# Altium PCB connecters.PcbDoc
Units mm, origin at the board's own origin, x right, y up, seen from the top; angles counter-clockwise.
Board outline 50 x 25 mm, 2 copper layers (Top Layer, Bottom Layer); 11 components, 9 nets, 37 pads, 25 vias.
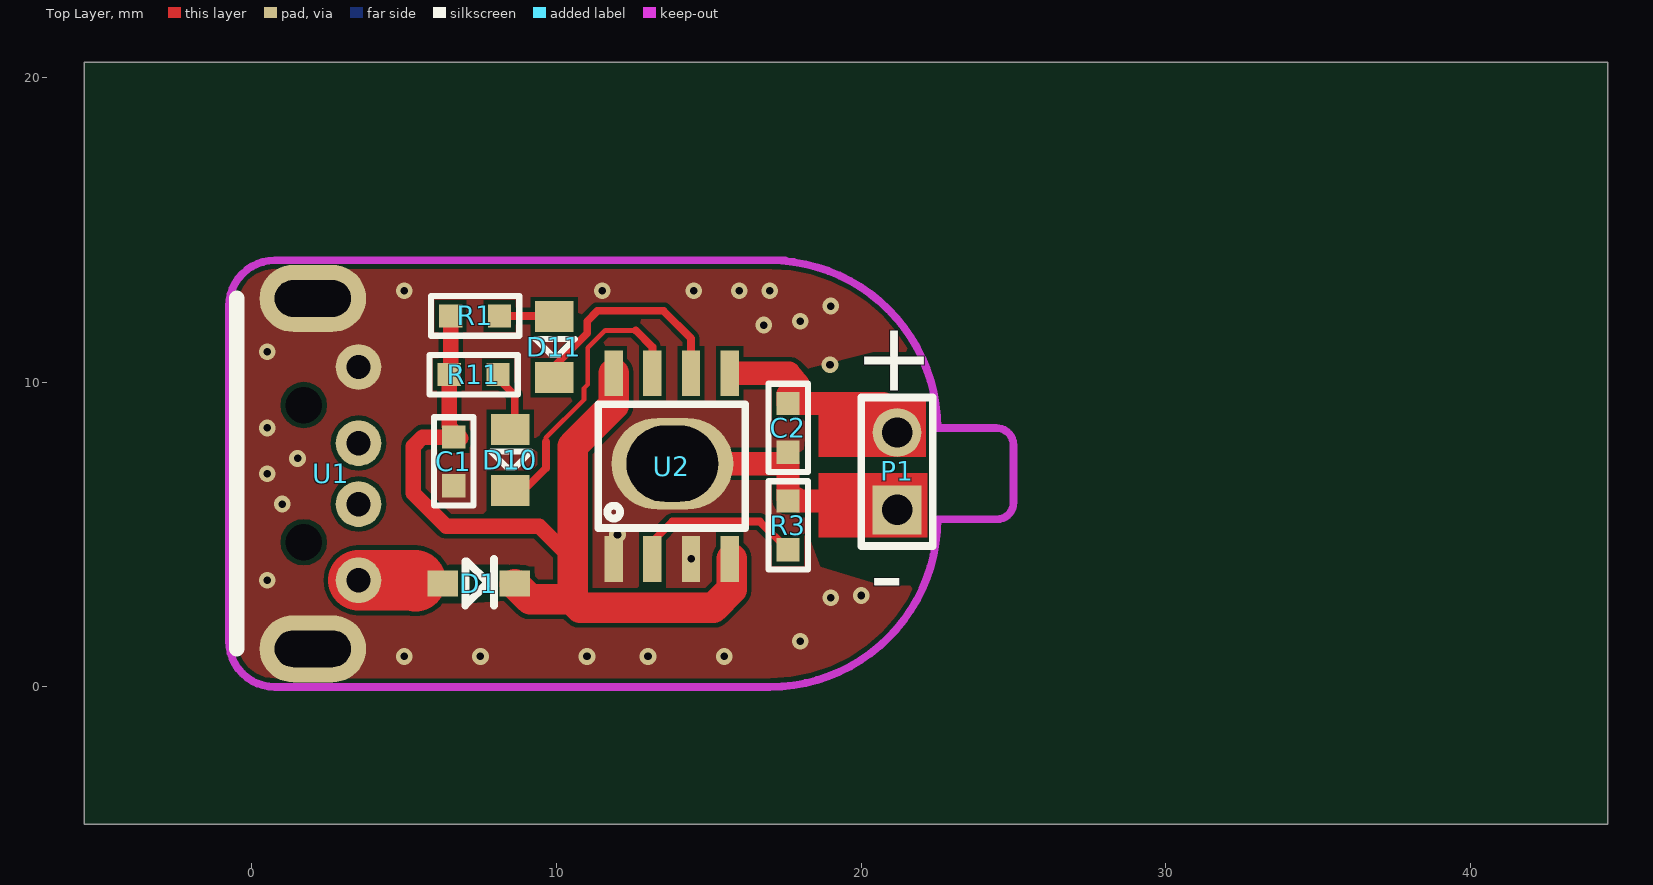
[diagram p0: Top Layer view]
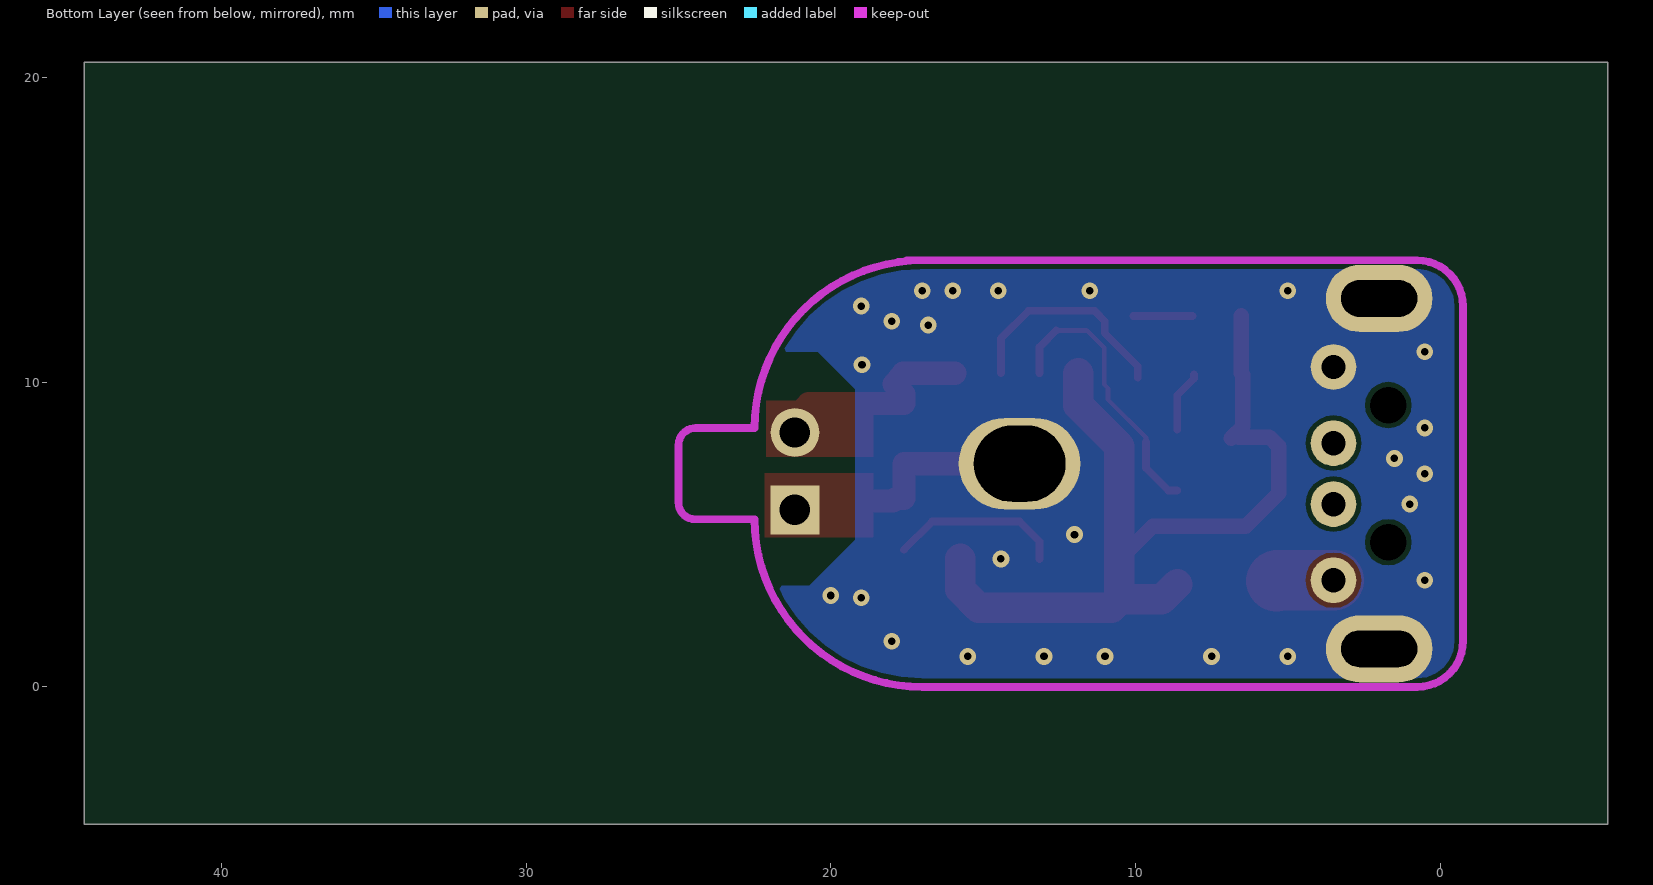
[diagram p1: Bottom Layer view, seen from below]

## Layer stack, top to bottom
Top Layer: signal copper 0.0356
Dielectric: dielectric 0.32, FR-4, Dk 4.8
Bottom Layer: signal copper 0.0356

## Board outline
-5.5,20.5 -5.5,-4.5 44.5,-4.5 44.5,20.5

## Design rules (kind name [scope] priority, off if disabled: settings)
Clearance [All] p1: gap=0.152
ComponentClearance [All] p1 off: gap=0.254 collisioncheckmode=3 verticalgap=0.254 showdistances=FALSE
Height [All] p1 off: minheight=0 maxheight=25.4 prefheight=12.7
HoleToHoleClearance [All] p1 off: gap=0.254 allowstackedmicrovias=TRUE
MinimumSolderMaskSliver [All] p1 off: minsoldermaskwidth=0.254
PlaneConnect [All] p1: planeconnectstyle=Direct reliefexpansion=0.508 reliefentries=4 reliefconductorwidth=0.254 reliefairgap=0.254
PolygonConnect [All] p1: connectstyle=Direct reliefconductorwidth=0.254 reliefentries=4 polygonreliefangle="90 Angle" airgapwidth=0.254
RoutingVias [All] p1: holewidth=0.25 width=0.55 viastyle="Through Hole" minholewidth=0.25 minwidth=0.55 maxholewidth=3 maxwidth=30
SilkToSilkClearance [All] p1 off: silktosilkclearance=0.254
SilkToSolderMaskClearance [IsPad] p1 off: minsilkscreentomaskgap=0.254 clearancetoexposedcopper=TRUE
SolderMaskExpansion [All] p1: expansion=0.102
Width [All] p1: maxlimit=25.4 minlimit=0.152 preferedwidth=0.152 minimp=50.000000 maximp=50.000000 favimp=50.000000
21 further rules are at their usual default settings.

## Components (designator, comment, footprint, x,y, rotation, side; value= is the part's Value field where it differs from the comment)
C1 "C10uF" 0603C 6.625,8.2 r270 top
C2 "C10uF" 0603C 17.6,9.3 r270 top
D1 "1N5819WS" LC-SOD-323F 7.45,3.4 r180 top
D10 "LED-B" LED 8.475,8.45 r270 top
D11 "LED-R" LED 9.925,12.15 r270 top
P1 "Head2" HEAD2 21.175,8.35 r180 top
R1 "R2K" 0603R 8.125,12.175 r180 top
R3 "1K" 0603R 17.6,6.1 r270 top
R11 "R2K" 0603R 8.075,10.25 r180 top
U1 "USB-A" USB-A 3.5,3.5 r0 top
U2 "TP4056" SOP-8 11.875,4.2 r90 top

## Footprints (in the part's own frame and the unit in brackets; to place one, negate y for a bottom-side part, rotate by r counter-clockwise, add the part's x,y. Pads: shape width x height; smd on the part's side, far side on the other; paste and mask are expansions set on the pad)
0603C [mil]
  rect 30x30 smd: 1(0,0) 2(62.99,0)
  silkscreen extent -26,-26 89,26
0603R [mil]
  rect 30x30 smd: 1(0,0) 2(62.99,0)
  silkscreen extent -26,-26 89,26
HEAD2 [mm]
  rect 1.6x1.6 hole 1: 1(0,2.54)
  round 1.6 hole 1: 2(0,0)
  silkscreen extent -1.17,-1.15 1.17,3.72
LC-SOD-323F [mm]
  rect 1x0.83 smd: 1(1.18,0.025) 1(1.18,0) 2(-1.18,0.025) 2(-1.18,0)
  silkscreen extent -0.5,-0.8 0.45,0.72, body extent -1.4,-0.67 1.4,0.68, height 0.75
LED [mil]
  rect 40x50 smd: 1(0,0) 2(78.74,0)
  silkscreen extent 29,-25 49,27
SOP-8 [mm]
  rect 1.5x0.6 smd: 1(0,0) 2(0,-1.27) 3(0,-2.54) 4(0,-3.81) 5(6.096,-3.81) 6(6.096,-2.54) 7(6.096,-1.27) 8(6.096,0)
  silkscreen extent 1.02,-4.32 5.08,0.51
USB-A [mm]
  oval 3.5x2.2 hole 1.2 slot 2.5 at 0 deg: 0(-1.5,-2.25) 0(-1.5,9.25)
  round 1.5 hole 0.8: 1(0,0) 2(0,2.5) 3(0,4.5) 4(0,7)
  round 1 hole 1.2: 5(-1.8,1.25) 5(-1.8,5.75)
  silkscreen extent -4,-2.25 -4,9.25

## Part data
D1: library part 1N5822
D10 D11: library part LED
R1 R11: library part R1K
R3: library part R5K

## Free pads (board coordinates)
  oval 4x3 hole 2.5 slot 3 at 0 deg: 0(13.8,7.325)

## Via types
v1: diameter 0.55, hole 0.25, Top Layer to Bottom Layer, 25 vias

## Nets (pads, with @x,y where several pads share a name; then routed paths per layer and width w, separated by ;. In a path a pad name is that pad's centre, name@x,y a point inside that pad or via, vN(x,y) a via of type N, cw(c..) or ccw(c..) an arc to the next point about the centre after c; other vN are vias at no path point)
GND: C1.2 C2.2 P1.1 pad.0 R3.1 U1.0 U1.4 U2.1 U2.3 | length 7.8
  Top Layer w0.762: pad.0@14.625,7.325 17.6,7.325 17.6,6.187 17.866,6.187 17.953,6.1 20.965,6.1 P1.1@21.175,6.31
  other v1: 5,1 7.5,1 11,1 13,1 15.5,1 18,1.5 19,2.925 20,3 0.5,3.5 14.415,4.2 12,5 1,6 0.5,7 1.5,7.5 0.5,8.5 18.975,10.575 0.5,11 16.8,11.875 18,12 19,12.5 5,13 11.5,13 14.5,13 16,13 17,13
NetC1_1: C1.1 D1.2 R1.2 R11.2 U2.4 U2.8 | length 31.3
  Top Layer w0.508: R1.2 6.525,10.3 R11.2 6.475,8.55 C1.1@6.862,8.163 ; C1.1 5.6,8.2 5.3,7.9 5.3,6.35 6.375,5.275 9.425,5.275 10.5,4.2 10.5,2.875
  Top Layer w1: D1.2@8.63,3.375 9.13,2.875 10.5,2.875 ; U2.8 11.875,9.25 10.531,7.906 10.531,2.906 10.5,2.875 ; U2.4@15.75,4.2 15.75,3.2 15.15,2.6 10.775,2.6 10.5,2.875
NetC2_1: C2.1 P1.2 U2.5 | length 6.7
  Top Layer w0.762: U2.5@15.925,10.296 17.629,10.296 17.918,9.934 17.6,9.616 C2.1 20.725,9.3 P1.2@21.175,8.85
NetD1_1: D1.1 U1.1 | length 1.9
  Top Layer w2: U1.1 5.35,3.5 5.375,3.475
NetD10_1: D10.1 R11.1 | length 2
  Top Layer w0.254: R11.1 8.075,10.125 8.625,9.575 D10.1@8.625,8.45
NetD10_2: D10.2 U2.7 | length 9.3
  Top Layer w0.152: 9.65,8.05 9.65,8.175 10.9,9.425 10.9,9.8 11.025,9.925 11.025,11.125 11.6,11.7 12.6,11.7
  Top Layer w0.254: D10.2@8.625,6.45 8.925,6.45 9.65,7.175 9.65,8.05 ; 12.6,11.7 13.145,11.155 U2.7
NetD11_1: D11.1 R1.1 | length 2
  Top Layer w0.254: R1.1 D11.1@10.075,12.175
NetD11_2: D11.2 U2.6 | length 7.4
  Top Layer w0.254: D11.2 9.925,10.528 11.003,11.606 11.003,12.003 11.344,12.344 13.506,12.344 14.415,11.435 U2.6
NetR3_2: R3.2 U2.2 | length 5.7
  Top Layer w0.254: U2.2 13.145,4.77 13.8,5.425 16.675,5.425 R3.2
pads on no net: U1.2 U1.3 U1.5

## Polygon pours and split planes (outlines as drawn)
GND on Top Layer "Keep-Out Layer-No Net" (solid, remove dead copper, pour order 4): -0.225,14.55 -0.05,14.375 21.75,14.375 21.75,13.625 27.6,7.775 25.85,6.025 25.85,-0.35 2.15,-0.35 -0.8,-3.3 -4.525,0.425 -4.525,4.825
GND on Bottom Layer "Keep-Out Layer-No Net" (solid, remove dead copper, pour order 6): -0.15,14.675 19.675,14.675 26.275,8.075 25.225,7.025 25.225,-1.175 19,-1.175 16.875,-3.3 15.5,-1.925 -2.325,-1.925 -2.325,10 -4.7,12.375

## Keep-outs
Keep-Out Layer:
  lines w0.254: 0.75,0 cw(c0.75,1.5) -0.75,1.5 -0.75,12.5 cw(c0.75,12.5) 0.75,14 17.5,14 ; 0.825,0 17,0 ccw(c17,5.5) 22.5,5.5 24.45,5.5 ccw(c24.45,6.05) 25,6.05 25,7.925 ; 17,14 cw(c17,8.5) 22.5,8.5 24.425,8.5 ; 24.41,8.5 cw(c24.425,7.925) 25,7.94

## Other copper
Top Layer:
  rectangle net NetC2_1: 18.6,7.55 22.125,9.4
  rectangle net GND: 18.6,4.9 22.175,7.025
  pour cut-out: 6.525,4.025 9,4 9.275,3.9 9.3,3.6 9.13,2.875 6.9,2.725 6.175,2.725 6.025,3.025 6.175,3.925
  pour cut-out: 21.85,11 20.425,11 18.35,10.475 18.075,7.425 18.15,5.275 18.65,3.95 20.7,3.325 22,3.325 22,3.625 22.525,4.15 22.5,5.5 25,5.5 24.975,7.025 25,8.025 25,8.5 24.6,8.5 23.575,8.475 22.5,8.5 22.525,8.975 22.4,9.375 22.3,10.175
Bottom Layer:
  pour cut-out: 21.85,11 20.425,11 19.2,9.775 19.2,4.825 20.7,3.325 22,3.325 22,3.625 22.525,4.15 22.5,5.5 25,5.5 25,8.4 24.6,8.5 23.4,8.525 22.5,8.5 22.525,8.975 22.3,9.2 22.3,10.175

## Silkscreen, mask and mechanical layers (free items; w line width, h text height)
Top Overlay:
  text "+" at 19.775,9.725 h2.29
  text "-" at 20.275,2.575 h2.29
Top Solder:
  rectangle: 18.7,4.925 22.175,6.975
  rectangle: 18.7,7.55 22.125,9.675
Bottom Solder:
  rectangle: 4.825,0.85 19.05,13.25